# Altium PCB JC_Linearity_Board.PcbDoc
Units mm, origin at the board's own origin, x right, y up, seen from the top; angles counter-clockwise.
Board outline 48.85 x 80.35 mm, 4 copper layers (Top Layer, Mid-Layer 1, Mid-Layer 5, Bottom Layer), stack 2.382 mm thick; 26 components, 17 nets, 119 pads, 93 vias.
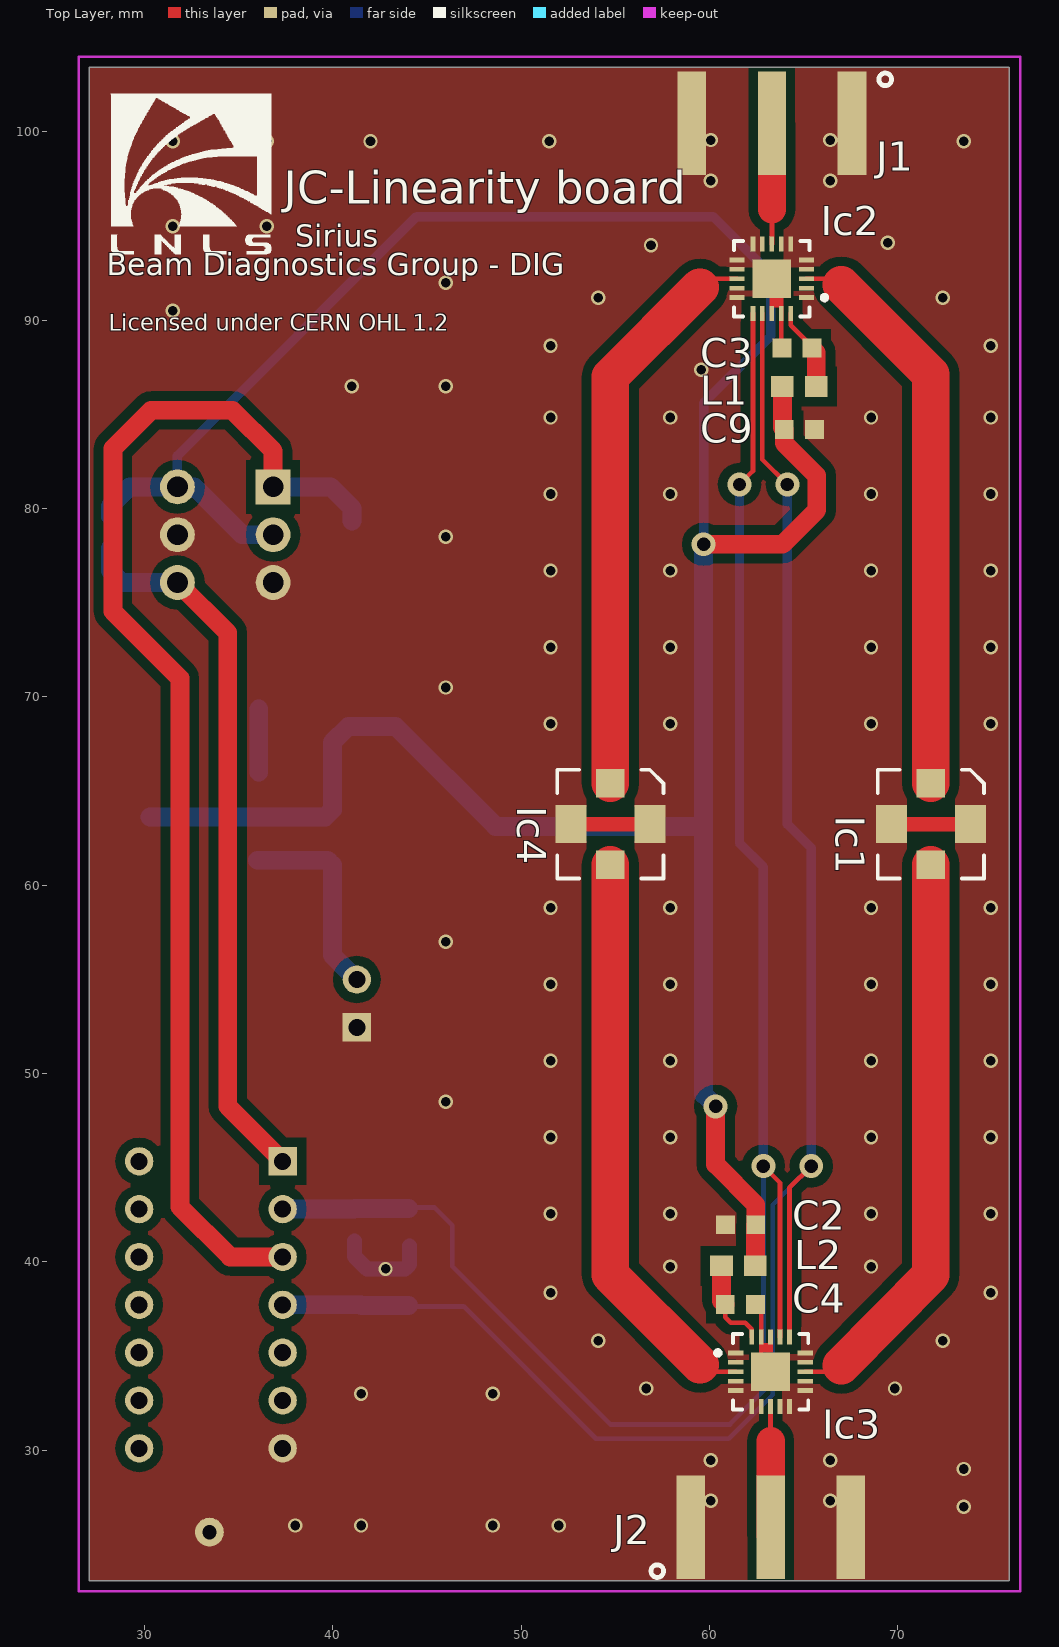
[diagram p0: Top Layer view]
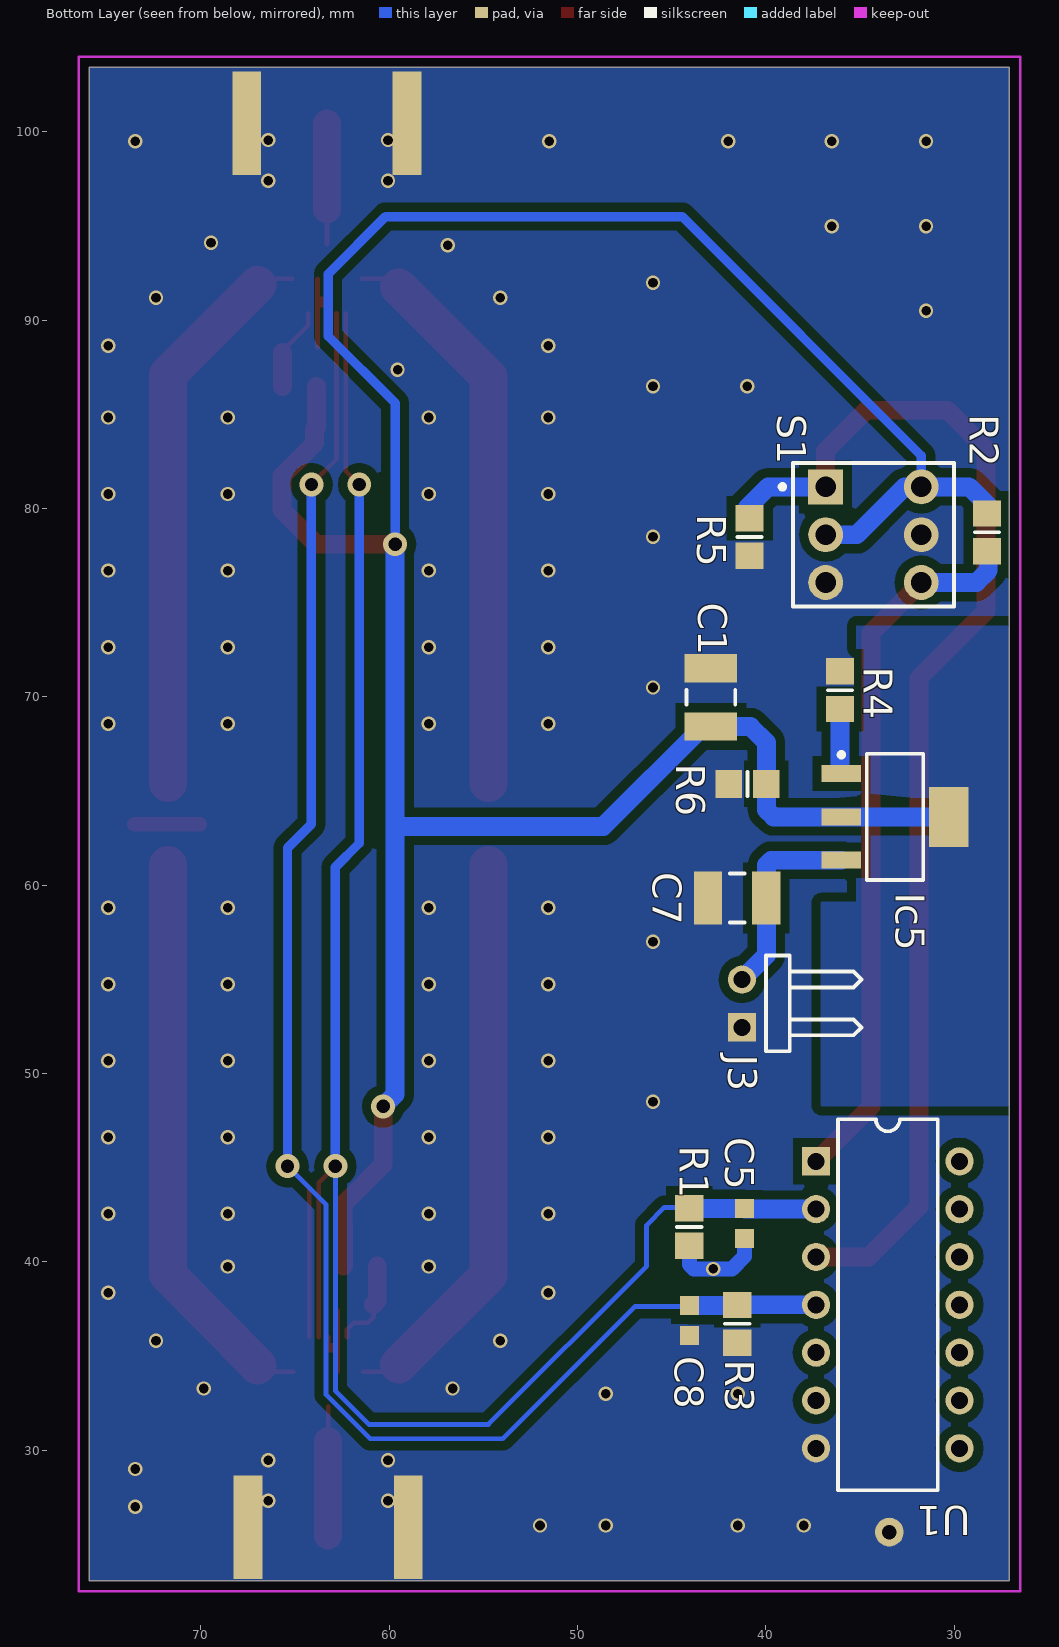
[diagram p1: Bottom Layer view, seen from below]

## Layer stack, top to bottom
Top Layer: signal copper 0.0356
Dielectric: core 1.6, FR-4, Dk 4.8
Mid-Layer 1: signal copper 0.0356
Dielectric: dielectric 0.32, FR-4, Dk 4.8
Mid-Layer 5: signal copper 0.0356
Dielectric: dielectric 0.32, FR-4, Dk 4.8
Bottom Layer: signal copper 0.0356

## Board outline
27.075,103.425 27.075,23.075 75.925,23.075 75.925,103.425 27.075,103.425

## Design rules (kind name [scope] priority, off if disabled: settings)
Clearance [All] p1: gap=0.5
PlaneConnect [All] p1: planeconnectstyle=Direct reliefexpansion=0.508 reliefentries=4 reliefconductorwidth=0.5 reliefairgap=0
PolygonConnect [All] p1: connectstyle=Direct reliefconductorwidth=0.254 reliefentries=4 polygonreliefangle="90 Angle" airgapwidth=0.254
RoomDefinition SwitchingBoard [InComponentClass('SwitchingBoard')] p1: confinementstyle=ConfineIn formatcopy=TRUE lockcomponents=FALSE outline 26.8,22.8 76.2,22.8 76.2,103.7 26.8,103.7
RoutingVias [All] p1: holewidth=0.711 width=1.27 viastyle="Through Hole" minholewidth=0.711 minwidth=1.27 maxholewidth=0.711 maxwidth=1.27
SilkToSolderMaskClearance SilkscreenOverComponentPads [IsPad] p1: minsilkscreentomaskgap=0.254 clearancetoexposedcopper=TRUE
SolderMaskExpansion [All] p1: expansion=0.102
Width [All] p1: maxlimit=2.2 minlimit=0.127 preferedwidth=0.254
26 further rules are at their usual default settings.

## Components (designator, comment, footprint, x,y, rotation, side; value= is the part's Value field where it differs from the comment)
C1 "C1608Y5V1C225Z" CAPC3225M 42.926,69.977 r90 bottom
C2 "C1608C0G1H101J" CAPC1608N 61.66,41.972 r180 top
C3 "C1608C0G1H101J" CAPC1608N 64.643,88.519 r180 top
C4 "C1608C0G1H101J" CAPC1608N 61.637,37.727 r0 top
C5 "C1608C0G1H101J" CAPC1608N 41.148,42.037 r270 bottom
C7 "C1608Y5V1C225Z" CAPC3225M 41.529,59.325 r0 bottom
C8 "C1608C0G1H101J" CAPC1608N 44.069,36.89 r270 bottom
C9 "C1608C0G1H101J" CAPC1608N 64.77,84.201 r0 top
Ic1 "PAT-1+" AF320 71.755,65.405 r270 top
Ic2 "HSWA2-30DR+" DG983-1 63.309,92.202 r180 top
Ic3 "HSWA2-30DR+" DG983-1 63.246,34.163 r0 top
Ic4 "PAT-5+" AF320 54.737,65.405 r270 top
Ic5 "LT3080EST#PBF" SOT223-4L 33.147,63.627 r180 bottom
J1 "CONN SMA" SMAedge50R 67.564,100.451 r180 top
J2 "CONN SMA" SMAedge50R 59,25.915 r0 top
J3 "CONN HEADR" HDR1X2H 41.275,52.451 r90 bottom
L1 "Inductor 100 nH" CAPC1608M 64.77,86.487 r180 top
L2 "Inductor 100 nH" CAPC1608M 61.537,39.786 r180 top
R1 "ERJ-3GEYJ103V" RESC2012M 44.069,41.847 r270 bottom
R2 "PNM0603E1002BST5" RESC2012M 28.264,78.74 r90 bottom
R3 "ERJ-3GEYJ103V" RESC2012M 41.529,36.71 r270 bottom
R4 "ERJ-3GEYJ334V" RESC2012M 36.068,70.358 r270 bottom
R5 "PNM0603E1002BST5" RESC2012M 40.871,78.486 r90 bottom
R6 "ERJ-3GEYJ122V" RESC2012M 40.98,65.38 r180 bottom
S1 "SW-DPDT" DPDT-6 34.29,78.613 r180 bottom
U1 "SN74LS14N" 646-06 33.528,37.719 r270 bottom

## Footprints (in the part's own frame and the unit in brackets; to place one, negate y for a bottom-side part, rotate by r counter-clockwise, add the part's x,y. Pads: shape width x height; smd on the part's side, far side on the other; paste and mask are expansions set on the pad)
646-06 [mm] "DIP; 14 Leads; Row Spacing 7.62 mm; Pitch 2.54 mm"
  rect 1.5x1.5 hole 0.9: 1(-7.62,-3.81)
  round 1.5 hole 0.9: 2(-5.08,-3.81) 3(-2.54,-3.81) 4(0,-3.81) 5(2.54,-3.81) 6(5.08,-3.81) 7(7.62,-3.81) 8(7.62,3.81) 9(5.08,3.81) 10(2.54,3.81) 11(0,3.81) 12(-2.54,3.81) 13(-5.08,3.81) 14(-7.62,3.81)
  silkscreen extent -9.85,-2.65 9.85,2.65
AF320 [mm]
  rect 1.52x1.52 smd: 1(0,0) 3(4.32,0)
  rect 2.03x1.65 smd: 2(2.16,-2.095) 4(2.16,2.095)
  silkscreen extent -0.72,-2.82 5.05,2.82, body extent 0,-1.99 4.3,2, height 1.45
CAPC1608M [mm] "Chip Capacitor, Body 1.6x0.8mm, IPC Low Density"
  rect 1.2x1.1 smd: 1(-0.9,0) 2(0.9,0)
  body extent -0.87,-0.48 0.87,0.48, height 0.85
CAPC1608N [mm] "Chip Capacitor, Body 1.6x0.8mm, IPC Medium Density"
  rect 1x1 smd: 1(-0.8,0) 2(0.8,0)
  body extent -0.87,-0.48 0.87,0.48, height 0.85
CAPC3225M [mm] "Chip Capacitor, Body 3.2x2.5mm, IPC Low Density"
  rect 1.5x2.8 smd: 1(-1.55,0) 2(1.55,0)
  silkscreen extent -0.4,-1.3 0.4,1.3, body extent -1.7,-1.35 1.7,1.35, height 1.35
DG983-1 [mm]
  rect 0.81x0.25 smd: 1(-1.845,1) 2(-1.845,0.5) 3(-1.845,0) 4(-1.845,-0.5) 5(-1.845,-1) 11(1.845,-1) 12(1.845,-0.5) 13(1.845,0) 14(1.845,0.5) 15(1.845,1)
  rect 0.25x0.81 smd: 6(-1,-1.845) 7(-0.5,-1.845) 8(0,-1.845) 9(0.5,-1.845) 10(1,-1.845) 16(1,1.845) 17(0.5,1.845) 18(0,1.845) 19(-0.5,1.845) 20(-1,1.845)
  rect 2.06x2.06 smd: 21(0,0)
  silkscreen extent -2.93,-2 2,2, body extent -2,-2 2,2, height 0.9
DPDT-6 [mm] "Switch; 6 Leads"
  rect 1.85x1.85 hole 1.1: 1(-2.54,2.54)
  round 1.85 hole 1.1: 2(-2.54,0) 3(-2.54,-2.54) 4(2.54,-2.54) 5(2.54,0) 6(2.54,2.54)
  silkscreen extent -4.96,-3.81 4.28,3.81
HDR1X2H [mm] "Connector; Header; 2 Position; Right Angle"
  rect 1.5x1.5 hole 0.9: 1(0,0)
  round 1.5 hole 0.9: 2(2.54,0)
  silkscreen extent -1.27,-6.35 3.81,-1.27
RESC2012M [mm] "Chip Resistor, Body 2.0x1.3mm, IPC Low Density"
  rect 1.4x1.5 smd: 1(-1,0) 2(1,0)
  silkscreen extent 0,-0.65 0,0.65, body extent -1.07,-0.7 1.07,0.7, height 0.65
SMAedge50R [mm] "SMA connector for RF board edge"
  rect 1.524x5.5 smd: 1(0,0) 2(8.5,0)
  rect 1.524x5.5 smd far side: 3(0,0) 4(8.5,0)
  rect 1.5x5.5 smd: 5(4.25,0)
  silkscreen extent -2.11,-2.68 -1.44,-2, body extent -0.75,-17.1 9.25,2, height 3.96
SOT223-4L [mm] "SOT223, 4-Leads, Body 6.5x3.5mm, Pitch 2.3mm, Lead Span 7mm, IPC High Density"
  rect 2.1x0.9 smd: 1(-2.85,2.3) 2(-2.85,0) 3(-2.85,-2.3)
  rect 2.1x3.2 smd: 4(2.85,0)
  silkscreen extent -2.98,-3.35 1.5,3.42, body extent -1.85,-3.35 1.85,3.35, height 1.8

## Part data
C1: library part "Cap Pol3", "Polarized Capacitor (Surface Mount)"
C2 C3 C4 C5 C8 C9: "CAP CER 100PF 50V 5% NP0 0603"
C7: library part "Cap Pol3", "'CAP CER 100PF 50V 5% NP0 0603"
Ic1: library part Minicircuits-PAT-1+, "Fixed Attenuator 1 dB"
Ic2 Ic3: library part Minicircuits-HSWA2-30DR+, "Absoptive RF Switch SPDT"
Ic4: library part Minicircuits-PAT-3+, "Fixed Attenuator 3 dB"
Ic5: "IC REG LDO 1.1A ADJ SOT223-3"
J1 J2: library part 132289RP, "CONN RCPT BLKHD SMA REV POL PCB"
J3: library part 4-103321-4, "CONN HEADR BRKWAY .100 2POS STR"
L1 L2: library part Inductor
R1 R3: "RES 10K OHM 1/10W 5% 0603 SMD"
R2 R5: "RES 10K OHM .15W 0.1% 0603 SMD"
R4: library part Res3, "RES 330K OHM 1/10W 5% 0603 SMD"
R6: library part Res3, "RES 1K2 OHM 1/10W 5% 0603 SMD"
S1: "Double-Pole, Double-Throw Switch"
U1: "Hex Schmitt-Trigger Inverter"

## Free pads (board coordinates)
  round 1.524 hole 0.762: 0(33.45,25.65)

## Via types
v1: diameter 0.762, hole 0.508, Top Layer to Bottom Layer, 87 vias
v2: diameter 1.27, hole 0.711, Top Layer to Bottom Layer, 6 vias

## Nets (pads, with @x,y where several pads share a name; then routed paths per layer and width w, separated by ;. In a path a pad name is that pad's centre, name@x,y a point inside that pad or via, vN(x,y) a via of type N, cw(c..) or ccw(c..) an arc to the next point about the centre after c; other vN are vias at no path point)
+3V: C1.1 C2.1 C9.1 Ic5.2 Ic5.4 L1.2 L2.1 R2.2 R6.2 S1.2 S1.6 | length 155.3
  Top Layer w1: v2(59.69,78.105) 63.881,78.105 65.697,79.921 65.697,81.75 63.97,83.477 C9.1 63.87,84.301 L1.2 ; v2(60.325,48.26) 60.325,45.171 62.46,43.036 C2.1 ; L2.1 C2.1@62.437,41.949
  Bottom Layer w0.5: S1.6 31.75,82.804 44.45,95.504 60.198,95.504 63.246,92.456 63.246,89.154 59.69,85.598 v2(59.69,78.105)
  Bottom Layer w1: R2.2@28.194,79.59 28.194,80.137 29.21,81.153 S1.6 32.639,81.153 35.179,78.613 S1.2 ; Ic5.4 Ic5.2 39.598,63.627 39.979,64.008 39.979,67.579 40.827,68.427 C1.1 43.333,68.427 48.641,63.119 59.69,63.119 ; v2(59.69,78.105) 59.69,63.119 ; v2(60.325,48.26) 59.69,48.895 59.69,63.119
+3VSW1: C3.1 Ic2.20 L1.1 | length 4.4
  Top Layer w0.25: Ic2.20 64.31,89.741 65.67,88.381 C3.1@65.67,88.292
  Top Layer w1: L1.1 C3.1@65.67,88.292
+3VSW2: C4.1 Ic3.20 L2.2 | length 4.9
  Top Layer w0.25: C4.1 60.837,37.063 61.137,36.763 61.9,36.763 62.246,36.417 Ic3.20
  Top Layer w1: L2.2 60.637,37.927 C4.1
+5V: C7.1 Ic5.3 J3.2 | length 10.7
  Bottom Layer w1: Ic5.3 39.723,61.327 39.979,61.071 C7.1 39.979,56.287 J3.2
GND: C1.2 C2.2 C3.2 C4.2 C5.2 C7.2 C8.2 C9.2 Ic1.2 Ic1.4 Ic2.1 Ic2.2 Ic2.4 Ic2.5 Ic2.6 Ic2.7 Ic2.9 Ic2.10 Ic2.11 Ic2.12 Ic2.14 Ic2.15 Ic2.18 Ic2.19 Ic2.21 Ic3.1 Ic3.2 Ic3.4 Ic3.5 Ic3.6 Ic3.7 Ic3.9 Ic3.10 Ic3.11 Ic3.12 Ic3.14 Ic3.15 Ic3.18 Ic3.19 Ic3.21 Ic4.2 Ic4.4 J1.1 J1.2 J1.3 J1.4 J2.1 J2.2 J2.3 J2.4 J3.1 pad.0 R1.2 R3.2 R4.1 R5.1 R6.1 S1.3 S1.5 U1.7 | length 22.1
  Top Layer w0.25: Ic3.21@62.746,34.163 62.746,35.56 ; C4.2@62.746,37.418 Ic3.19 62.746,35.56 ; Ic3.18 63.246,35.56 62.746,35.56 ; Ic2.18 63.309,90.805 ; Ic2.21 63.309,90.805 ; C3.2@63.809,88.553 Ic2.19 63.809,90.805 ; Ic2.21@63.809,92.202 63.809,90.805 ; 63.309,90.805 63.809,90.805
  Top Layer w0.76: Ic4.2@53.1,63.245 Ic4.4@56.4,63.245 ; Ic1.2@70.05,63.245 Ic1.4@73.55,63.245
  Bottom Layer w0.8: C5.2@41.148,41.099 41.148,40.287 41.811,39.624 v1(42.799,39.624) 43.834,39.624 44.069,39.859 R1.2
  other v1: 38,26 41.5,26 48.5,26 52,26 73.5,27 60.071,27.305 66.421,27.305 73.5,29 60.071,29.464 66.421,29.464 41.5,33 48.5,33 56.642,33.274 69.85,33.274 54.102,35.814 72.39,35.814 51.562,38.354 74.93,38.354 57.912,39.751 68.58,39.751 51.562,42.545 57.912,42.545 68.58,42.545 74.93,42.545 51.562,46.609 57.912,46.609 68.58,46.609 74.93,46.609 46,48.5 51.562,50.673 57.912,50.673 68.58,50.673 74.93,50.673 51.562,54.737 57.912,54.737 68.58,54.737 74.93,54.737 46,57 51.562,58.801 57.912,58.801 68.58,58.801 74.93,58.801 51.562,68.58 57.912,68.58 68.58,68.58 74.93,68.58 46,70.5 51.562,72.644 57.912,72.644 68.58,72.644 74.93,72.644 51.562,76.708 57.912,76.708 68.58,76.708 74.93,76.708 46,78.5 51.562,80.772 57.912,80.772 68.58,80.772 74.93,80.772 51.562,84.836 57.912,84.836 68.58,84.836 74.93,84.836 41,86.5 46,86.5 59.563,87.376 51.562,88.646 74.93,88.646 31.5,90.5 54.102,91.186 72.39,91.186 46,92 56.896,93.98 69.469,94.107 31.5,95 36.5,95 60.071,97.409 66.421,97.409 31.5,99.5 36.5,99.5 42,99.5 51.5,99.5 73.5,99.5 60.071,99.568 66.421,99.568
NetC5_1: C5.1 Ic2.16 Ic3.17 R1.1 U1.2 | length 99.7
  Top Layer w0.25: v2(61.595,81.28) 62.309,81.994 Ic2.16 ; v2(62.865,45.085) 63.746,44.204 Ic3.17
  Bottom Layer w0.254: R1.1@44.069,42.887 45.396,42.887 46.341,41.942 46.341,39.765 54.737,31.369 61.087,31.369 62.865,33.147 v2(62.865,45.085)
  Bottom Layer w0.5: v2(61.595,81.28) 61.595,62.23 62.865,60.96 v2(62.865,45.085)
  Bottom Layer w1: U1.2 C5.1@41.11,42.799 ; C5.1 R1.1@44.019,42.837
NetC8_1: C8.1 Ic2.17 Ic3.16 R3.1 U1.4 | length 98.7
  Top Layer w0.25: Ic2.17 62.81,82.605 v2(64.135,81.28) ; Ic3.16 64.246,43.926 v2(65.405,45.085)
  Bottom Layer w0.254: C8.1@44.069,37.63 46.952,37.63 53.975,30.607 61.024,30.607 63.359,32.942 63.359,43.039 63.627,43.307 v2(65.405,45.085)
  Bottom Layer w0.5: v2(64.135,81.28) 64.135,63.246 65.405,61.976 v2(65.405,45.085)
  Bottom Layer w1: U1.4 R3.1@41.49,37.719 ; R3.1@41.529,37.68 C8.1@44.019,37.68
NetIc1_1: Ic1.1 Ic2.3 | length 30.4
  Top Layer w0.254: Ic2.3 66.798,92.202 67,92
  Top Layer w2: 67,91.877 71.755,87.122 Ic1.1
NetIc1_3: Ic1.3 Ic3.13 | length 30.6
  Top Layer w0.254: Ic3.13 66.663,34.163 67,34.5
  Top Layer w2: 67,34.5 71.755,39.306 Ic1.3
NetIc2_8: Ic2.8 J1.5 | length 6.4
  Top Layer w0.254: Ic2.8@63.314,94.052 63.314,95.89
  Top Layer w1.5: 63.314,95.89 J1.5
NetIc2_13: Ic2.13 Ic4.1 | length 30.4
  Top Layer w0.254: 59.5,92 59.702,92.202 Ic2.13
  Top Layer w2: Ic4.1 54.737,86.995 59.5,91.758
NetIc3_3: Ic3.3 Ic4.3 | length 30.6
  Top Layer w0.254: 59.5,34.5 59.837,34.163 Ic3.3
  Top Layer w2: Ic4.3 54.737,39.306 59.5,34.543
NetIc3_8: Ic3.8 J2.5 | length 6.8
  Top Layer w0.254: 63.246,30.48 Ic3.8
  Top Layer w1.5: J2.5@63.25,25.465 63.25,30.476
NetIc5_1: Ic5.1 R4.2 | length 3.4
  Bottom Layer w1: Ic5.1@36.068,65.998 R4.2@36.068,69.35
NetR2_1: R2.1 S1.4 U1.1 | length 38
  Top Layer w1: S1.4 34.417,73.406 34.417,48.26 U1.1
  Bottom Layer w1: R2.1@28.194,77.89 28.194,76.708 28.829,76.073 S1.4
NetR5_2: R5.2 S1.1 U1.3 | length 65.8
  Top Layer w1: S1.1 36.83,83.058 34.671,85.217 30.353,85.217 28.321,83.185 28.321,74.549 31.877,70.993 31.877,42.926 34.544,40.259 U1.3
  Bottom Layer w1: S1.1 39.878,81.153 41.021,80.01 R5.2@41.021,79.336
VDD: U1.14
pads on no net: U1.5 U1.6 U1.8 U1.9 U1.10 U1.11 U1.12 U1.13

## Polygon pours and split planes (outlines as drawn)
+3V on Bottom Layer "Top Layer-No Net" (solid, pour order 8): 27,73.787 35.193,73.787 35.193,59.109 37.084,59.109 37.084,48.26 27,48.26 27,73.787
GND on Bottom Layer "Top Layer-No Net" (solid, remove dead copper, pour order 11): 75.925,103.432 75.925,23.064 27.075,23.064 27.078,23.064 27.078,103.438 27.078,103.43 75.926,103.43
GND on Top Layer "Top Layer-No Net" (solid, remove dead copper, pour order 5): 60.931,94.742 60.931,89.942 65.6,89.942 65.543,89.942 65.543,94.724 65.543,94.705 60.931,94.705
GND on Top Layer "Top Layer-No Net" (solid, remove dead copper, pour order 7): 60.991,36.524 65.491,36.524 65.491,31.944 65.491,31.921 60.991,31.921 60.968,31.921 60.968,36.524
GND on Top Layer "Top Layer-No Net" (solid, remove dead copper, pour order 9): 27,103.5 27,22.5 76.5,22.5 76.5,103.5 27,103.5

## Keep-outs
Keep-Out Layer:
  lines w0.127: 26.5,22.5 76.5,22.5 76.5,104 26.5,104 26.5,22.5

## Other copper
Top Layer:
  rectangle net GND: 62.746,35.179 63.373,35.56
  rectangle net GND: 63.434,90.805 63.809,91.262

## Silkscreen, mask and mechanical layers (free items; w line width, h text height)
Top Overlay:
  drawing of 5 lines, arcs and shapes, not listed
  text "JC-Linearity board" at 37.4,95.6 h3
  text "Sirius" at 38,93.5 h2
  text "Beam Diagnostics Group - DIG" at 28,92 h2
  text "Licensed under CERN OHL 1.2" at 28.1,89.15 h1.5